# Altium PCB PCB1.PcbDoc
Units mil, origin at the board's own origin, x right, y up, seen from the top; angles counter-clockwise.
Board outline 1081.52 x 1073.8 mil, 2 copper layers (Top Layer, Bottom Layer); 25 components, 22 nets, 125 pads, 40 vias.
Unrouted connection lines stored in the file: 53.
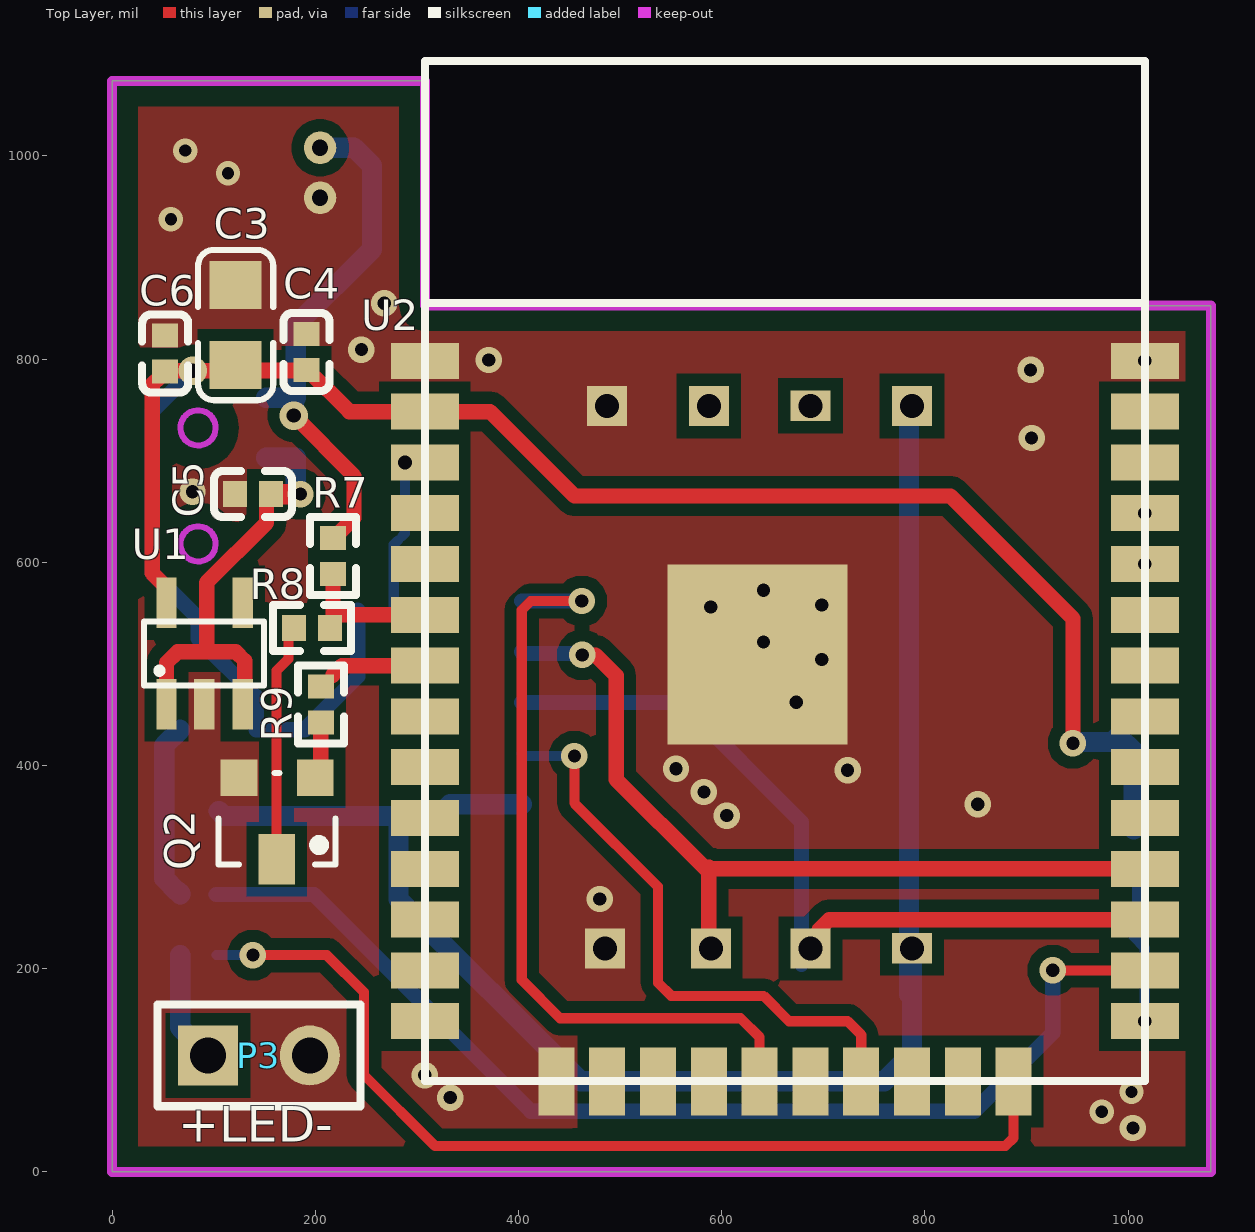
[diagram p0: Top Layer view]
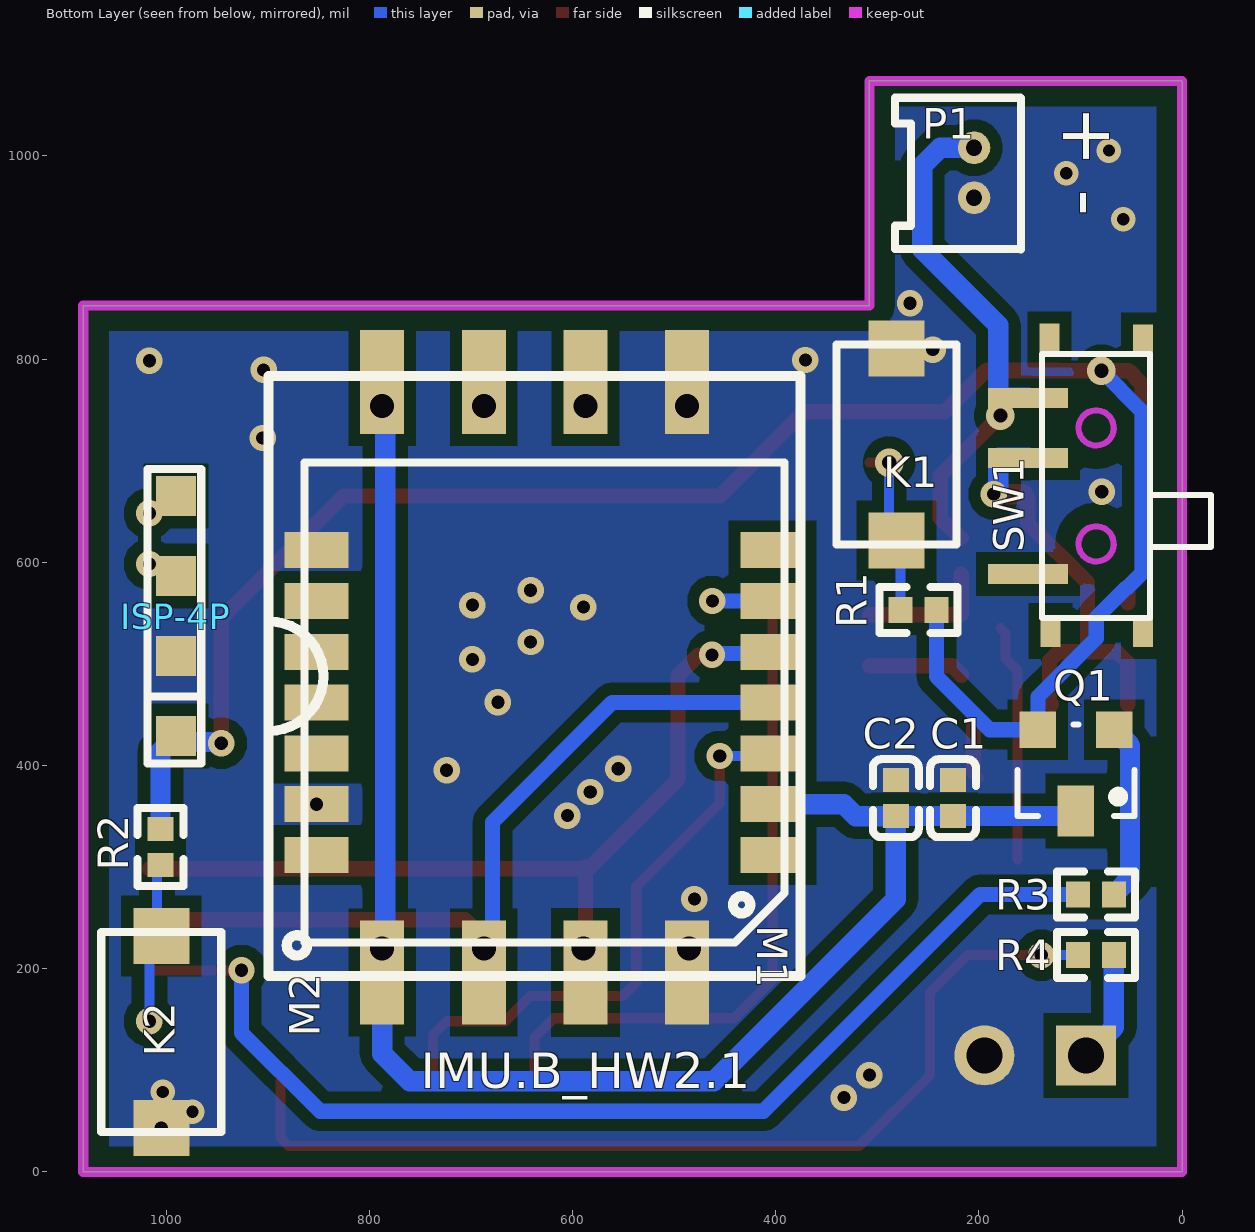
[diagram p1: Bottom Layer view, seen from below]
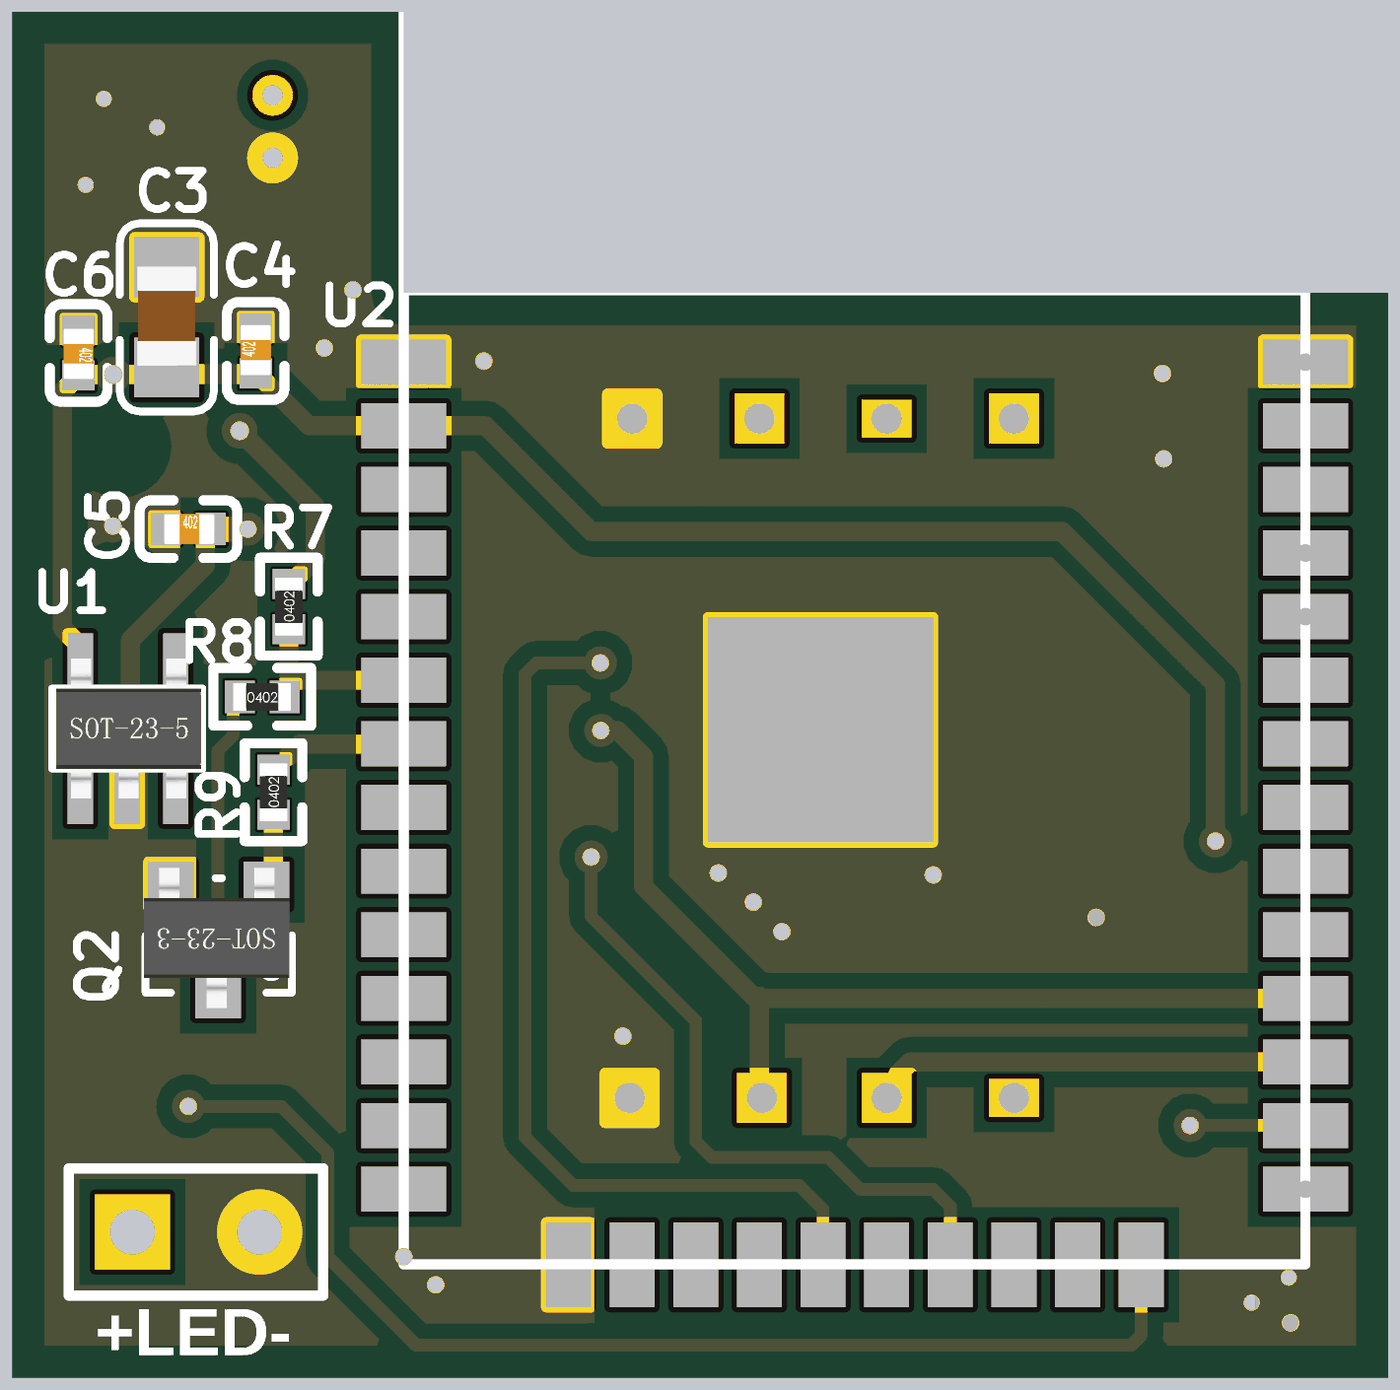
[diagram p2: 3D render of the assembled board from above, using the file's embedded part models]
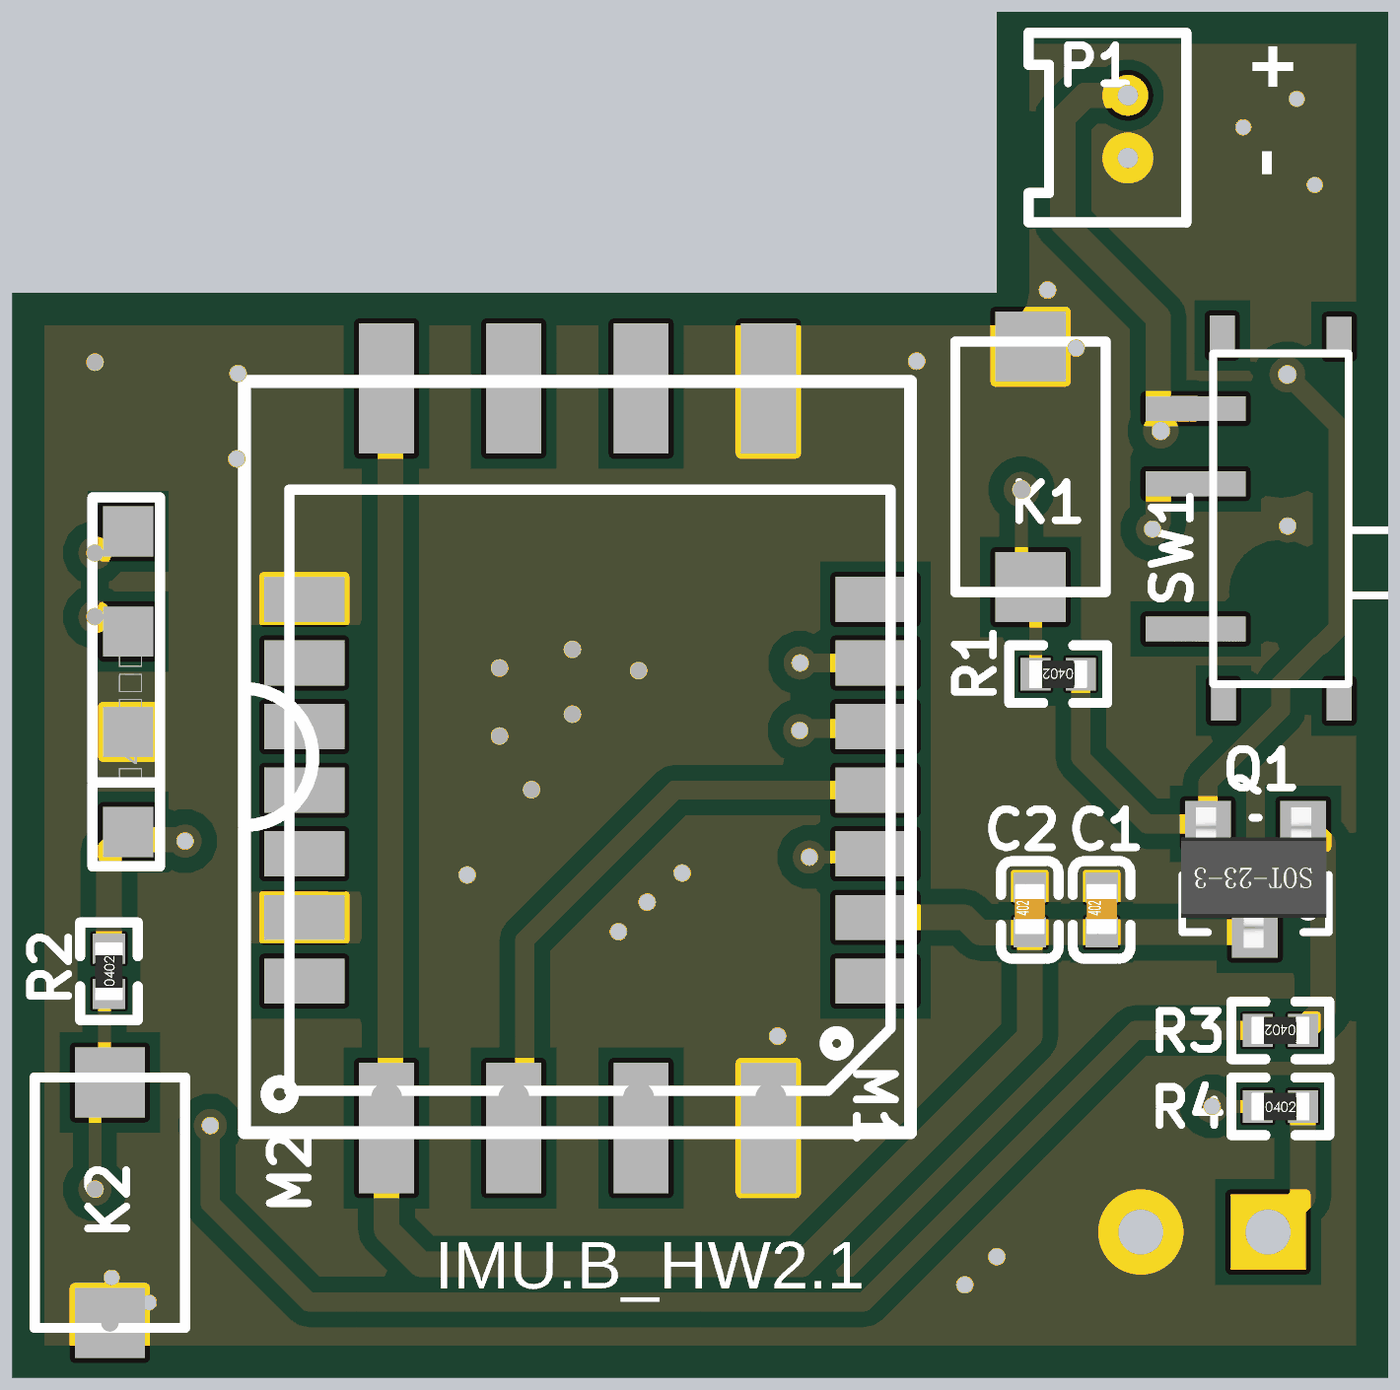
[diagram p3: 3D render of the assembled board from below, using the file's embedded part models]

## Layer stack, top to bottom
Top Solder: solder mask 0.4, Solder Resist, Dk 3.5
Top Layer: signal copper 1.4
Dielectric1: dielectric 12.6, FR-4, Dk 4.8
Bottom Layer: signal copper 1.4
Bottom Solder: solder mask 0.4, Solder Resist, Dk 3.5

## Board outline
0,0 1081.52,0 1081.52,852.74 307.78,852.74 307.78,1073.8 0,1073.8

## Design rules (kind name [scope] priority, off if disabled: settings)
Clearance Clearance_1 [OnLayer('Keep-Out Layer')] p1: gap=10 ignorepadtopadclearanceinfootprint=FALSE
Clearance [All] p2: gap=12 ignorepadtopadclearanceinfootprint=FALSE
PlaneConnect [All] p1: planeconnectstyle=Direct reliefexpansion=20 reliefentries=4 reliefconductorwidth=10 reliefairgap=10
PolygonConnect [All] p1: connectstyle=Direct reliefconductorwidth=10 reliefentries=4 polygonreliefangle="90 Angle" airgapwidth=10
RoutingVias [All] p1: holewidth=28 width=14 viastyle="Through Hole" minholewidth=24 minwidth=12 maxholewidth=200 maxwidth=100
SilkToSolderMaskClearance SilkscreenOverComponentPads [IsPad] p1: minsilkscreentomaskgap=10 clearancetoexposedcopper=TRUE
SolderMaskExpansion [All] p1: expansion=4 istentingtop=FALSE
Width [All] p1: maxlimit=200 minlimit=6 preferedwidth=10
28 further rules are at their usual default settings.

## Components (designator, comment, footprint, x,y, rotation, side; value= is the part's Value field where it differs from the comment)
C1 "4.7uF" 0402C 225.31,367.8 r90 bottom value=100nF
C2 "100nF" 0402C 281.79,367.8 r90 bottom
C3 "22uF" 0805C 121.56,833.52 r90 top value=100nF
C4 "100nF" 0402C 191.41,807.09 r90 top
C5 "10uF" 0402C 138.52,667.1 r0 top
C6 "1uF" 0402C 52.23,805.51 r270 top
ISP-4P "ISP-4P" ISP-4P-2.0/SMD 990.35,429 r90 bottom
K1 "RESET" KEY-SMD/2P/3*4 281.25,716.01 r180 bottom
K2 "BOOT" KEY-SMD/2P/3*4 1004.7,137.71 r0 bottom
M1 "imu" HI229 627.5,461.89 r0 bottom
M2 "GY95T" GY95T 637.26,487.94 r90 bottom
P1 "Header 2" CON-1.25-2P 204.69,1008.01 r270 bottom
P3 "Header 2" HDR1X2 94.52,114.65 r0 top
Q1 "SI2301" SOT-23 66.84,435.28 r0 bottom
Q2 "SI2300" SOT-23 199.84,387.74 r180 top
R1 "10K" 0402 259.44,553.11 r0 bottom
R2 "10K" 0402 1005.44,319.55 r90 bottom
R3 "10K" 0402 84.84,273.09 r0 bottom
R4 "150R" 0402 84.84,213.37 r180 bottom
R7 "10K/1%" 0402 217.44,606.17 r90 top
R8 "10K/1%" 0402 196.52,535.28 r0 top
R9 "10K" 0402 205.39,460.28 r90 top
SW1 "SW-SPDT" SW_MSK12C01 84.55,675.2 r0 bottom
U1 "ME6217C33M5G" SOT-23-5 90.52,510.28 r90 top
U2 "ESP-32S" ESP-32S 623.06,564.57 r0 top locked

## Footprints (in the part's own frame and the unit in brackets; to place one, negate y for a bottom-side part, rotate by r counter-clockwise, add the part's x,y. Pads: shape width x height; smd on the part's side, far side on the other; paste and mask are expansions set on the pad)
0402 [mm]
  rect 0.6x0.65 smd mask+0.051: 1(-0.45,0) 2(0.45,0)
  silkscreen extent -0.97,-0.58 0.97,0.58, body extent -0.57,-0.27 0.58,0.28, height 0.41
0402C [mm]
  rect 0.6x0.65 smd mask+0.051: 1(-0.45,0) 2(0.45,0)
  silkscreen extent -0.97,-0.58 0.97,0.58, body extent -0.48,-0.3 0.52,0.3, height 0.2
0805C [mm]
  rect 1.2x1.3 smd: 1(-1,0) 2(1,0)
  silkscreen extent -1.88,-0.94 1.88,0.94, body extent -0.97,-0.6 1.03,0.6, height 0.95
CON-1.25-2P [mil]
  round 32 hole 16: 1(0,0) 2(49.21,0)
  silkscreen extent -49,-78 100,46
ESP-32S [mm]
  rect 1.7x0.9 smd: 1(-8.009,5.937) 2(-8.009,4.667) 3(-8.009,3.397) 4(-8.009,2.127) 5(-8.009,0.857) 6(-8.009,-0.413) 7(-8.009,-1.683) 8(-8.009,-2.953) 9(-8.009,-4.223) 10(-8.009,-5.493) 11(-8.009,-6.763) 12(-8.009,-8.033) 13(-8.009,-9.303) 14(-8.009,-10.573) 25(9.991,-10.573) 26(9.991,-9.303) 27(9.991,-8.033) 28(9.991,-6.763) 29(9.991,-5.493) 30(9.991,-4.223) 31(9.991,-2.953) 32(9.991,-1.683) 33(9.991,-0.413) 34(9.991,0.857) 35(9.991,2.127) 36(9.991,3.397) 37(9.991,4.667) 38(9.991,5.937)
  rect 0.9x1.7 smd: 15(-4.719,-12.083) 16(-3.449,-12.083) 17(-2.179,-12.083) 18(-0.909,-12.083) 19(0.361,-12.083) 20(1.631,-12.083) 21(2.901,-12.083) 22(4.171,-12.083) 23(5.441,-12.083) 24(6.711,-12.083)
  rect 4.5x4.5 smd: 39(0.311,-1.403)
  silkscreen extent -8.01,-12.07 9.99,13.43
GY95T [mm]
  rect 2.6x1.1 smd: 1(-7.405,3.81) 2(-7.405,1.27) 3(-7.405,-1.27) 4(-7.405,-3.81) 5(7.356,-3.81) 6(7.356,-1.27) 7(7.356,1.27) 8(7.356,3.81)
  rect 0.762x1 hole 0.6: 1(-6.805,3.81) 7(6.756,1.27)
  rect 0.762x1 / inner rect 0.762x1 / far side rect 1x1 hole 0.6: 2(-6.805,1.27) 3(-6.805,-1.22) 4(-6.805,-3.86) 5(6.756,-3.81) 6(6.756,-1.27) 8(6.756,3.81)
  silkscreen extent -7.5,-6.65 7.5,6.65
HDR1X2 [mm] "Connector; Header; 2 Position"
  rect 1.5x1.5 hole 0.9: 1(0,0)
  round 1.5 hole 0.9: 2(2.54,0)
  silkscreen extent -1.27,-1.27 3.81,1.27
HI229 [mm]
  rect 1.6x0.9 smd: 1(-5.7,3.81) 2(-5.7,2.54) 3(-5.7,1.27) 4(-5.7,0) 5(-5.7,-1.27) 6(-5.7,-2.54) 7(-5.7,-3.81) 8(5.7,-3.81) 9(5.7,-2.54) 10(5.7,-1.27) 11(5.7,0) 12(5.7,1.27) 13(5.7,2.54) 14(5.7,3.81)
  silkscreen extent -6,-6 6,6
ISP-4P-2.0/SMD [mm]
  rect 1x1 smd paste+0: 1(0,0) 2(2,0) 3(4,0) 4(6,0)
  silkscreen extent -0.69,-0.64 6.68,0.71
KEY-SMD/2P/3*4 [mm] "3*6*4.3"
  rect 1.4x1.4 smd: 1(0,2.4) 2(0,-2.4)
  silkscreen extent -1.5,-2.5 1.5,2.5
SOT-23 [mil]
  rect 36x36 smd: 1(0,0) 2(75,0)
  rect 36x50 smd: 3(38,80)
  silkscreen extent -20,-5 95,85, body extent -18,-13 96,97, height 47
SOT-23-5 [mil]
  rect 50x20 smd: 1(-50,37) 2(-50,0) 3(-50,-38) 4(50,-38) 5(50,37)
  silkscreen extent -31,-59 32,59, body extent -55,-58 55,56, height 47
SW_MSK12C01 [mm]
  rect 2x0.5 smd: 1(1.7,2.2) 2(1.7,-0.7) 3(1.7,-2.2)
  rect 0.5x0.8 smd: 4(1.168,-3.658) 5(-1.168,-3.632) 6(-1.168,3.632) 7(1.143,3.632)
  Keep-Out Layer lines w0.152: -0.131,1.87 ccw(c0,1.45) -0.091,1.881 ; -0.131,-1.03 ccw(c0,-1.45) -0.091,-1.019
  silkscreen extent -2.87,-3.3 1.35,3.3

## Part data
C1 C2 C3 C4: library part CAP, "Capacitor", Published=8-Jun-2000, Publisher="Altium Limited", Revision="July-2002: Re-released for DXP Platform."
C5 C6: library part Cap, "Capacitor"
ISP-4P: "Header, 4-Pin", LatestRevisionDate=17-Jul-2002, LatestRevisionNote="Re-released for DXP Platform.", Publisher="Altium Limited"
K1 K2: library part BUTTON_2P
M1: library part HI229
P1 P3: "Header, 2-Pin", LatestRevisionDate=17-Jul-2002, LatestRevisionNote="Re-released for DXP Platform.", Publisher="Altium Limited"
Q1: library part MOSFET-P, "P-Channel Power MOSFET"
Q2: library part MOSFET-N, "N-Channel Power MOSFET"
R1 R2 R3 R4 R7 R8 R9: library part Res1, "Resistor"
SW1: "SPDT Subminiature Toggle Switch, Right Angle Mounting, Vertical Actuation"
U1: library part ME6212, "2~6V Input, 350mA output，Voltage LDO"
U2: "ESP32-S系列模组"

## Via types
v1: diameter 26, hole 13, Top Layer to Bottom Layer, tented both sides, 32 vias
v2: diameter 24, hole 12, Top Layer to Bottom Layer, tented both sides, 5 vias
v3: diameter 28, hole 14, Top Layer to Bottom Layer, tented both sides, 3 vias

## Nets (pads, with @x,y where several pads share a name; then routed paths per layer and width w, separated by ;. In a path a pad name is that pad's centre, name@x,y a point inside that pad or via, vN(x,y) a via of type N, cw(c..) or ccw(c..) an arc to the next point about the centre after c; other vN are vias at no path point)
3V3: C3.1 C4.1 C6.2 ISP-4P.1 Q1.2 R1.1 R2.2 U1.5 U2.2 | length 2238.2
  Top Layer w10: C3.1@121.56,787.8 C4.1@190.71,787.8 ; C3.1@122.92,791.72 C4.1@188.9,791.72
  Top Layer w15: U1.5 53.52,575.28 39.44,589.37 39.44,775 46.94,782.5 46.94,783.49 51.25,787.8 C6.2 53.02,788.58 v3(79.39,788.58) 190.63,788.58 C4.1 192.4,789.37 233.47,748.29 U2.2 371.91,748.29 454.98,665.22 825.17,665.22 945.65,544.75 v1(945.65,421.9)
  Bottom Layer w15: v3(79.39,788.58) 39.44,748.64 39.44,589.37 53.52,575.28 54.55,575.28 84.55,545.28 84.55,524.92 141.84,467.64 Q1.2 189.48,435.28 241.72,487.52 R1.1
  Bottom Layer w20: v1(945.65,421.9) 946.8,423.05 984.39,423.05 ISP-4P.1 1005.44,413.92 R2.2
ADC_EN: R9.2 U2.7 | length 94.9
  Top Layer w15: R9.2@217.44,488.49 217.44,489.47 226.26,498.29 U2.7
ADC_VBAT: R7.1 R8.2 U2.6 | length 130.5
  Top Layer w15: R7.1 217.44,548.29 U2.6
EN: K1.2 R1.2 U2.3 | length 162.8
  Top Layer w10: v3(288.29,698.11) 307.55,698.11 U2.3
  Bottom Layer w10: R1.2 277.16,617.43 K1.2 ; K1.2@285.71,625.99 288.29,628.56 v3(288.29,698.11)
GND: C1.2 C2.2 C3.2 C4.2 C5.1 C6.1 ISP-4P.2 K1.1 K2.1 M1.8 M1.13 M2.4 M2.5 P1.2 P3.2 Q2.2 U1.2 U2.1 U2.15 U2.38 U2.39
  other v1: 1004.7,43.22 332.84,73.12 307.73,95.3 479.98,268.58 604.98,350.69 851.91,361.89 582.49,373.89 723.87,395.28 554.98,396.81 673.39,462.32 698.51,504.45 641.2,521.6 589.23,555.9 698.51,557.92 641.2,572.51 79.12,669.49 904.98,722.34 903.99,789.37 1016.39,798.29 370.72,799.08 245.37,809.39 267.81,855.03
  other v2: 974.07,59.17 1003.3,78.78 57.82,937.62 114,982.89 72,1005.25
IMU_RST: M1.9
IO0: K2.2 R2.1 U2.25 | length 147.4
  Bottom Layer w10: K2.2 1016.39,220.51 v1(1016.39,148.29) ; K2.2@1008.96,232.2 R2.1@1008.96,290.83
IO2: R4.1 U2.24 | length 976.8
  Top Layer w10: v1@130.55,213.37 v1(138.52,213.37) 211.34,213.37 247.95,176.76 247.95,95.3 317.66,25.59 879.33,25.59 887.26,33.52 U2.24
  Bottom Layer w10: R4.1 v1(138.52,213.37)
NetC5_2: C5.2 SW1.2 U1.1 U1.3 | length 447
  Top Layer w15: U1.1 53.52,501.13 64.29,511.89 93.03,511.89 ; U1.3 130.55,462.32 130.55,503.11 121.77,511.89 93.03,511.89 ; C5.2 151.93,662.79 151.93,638.86 93.03,579.96 93.03,511.89
  Top Layer w20: C5.2 v1(185.36,667.1)
  Bottom Layer w20: SW1.2 180.69,702.76 180.85,702.6 180.85,673.23 185.36,668.72 v1(185.36,667.1)
NetP3_1: P3.1 R4.2 | length 110.1
  Bottom Layer w20: R4.2 67.12,142.05 P3.1
NetQ1_1: Q1.1 R3.1 | length 175.8
  Bottom Layer w20: Q1.1 51.25,419.7 51.25,288.96 64.32,275.89 65.31,275.89 67.12,274.08 R3.1
NetQ2_1: Q2.1 R9.1 | length 57.1
  Top Layer w10: Q2.1 Q2.1@205.39,393.29
  Top Layer w15: Q2.1@205.39,393.29 R9.1
NetQ2_3: Q2.3 R8.1 | length 234.6
  Top Layer w10: Q2.3 161.84,493.2 173.64,505.01 173.64,530.12 R8.1
SS_RX: M1.4 M2.2 U2.27 | length 817.6
  Top Layer w15: M2.2@695.77,209.85 695.77,238.22 705.84,248.29 U2.27
  Bottom Layer w15: M1.4 560.92,461.89 678.63,344.18 M2.2@678.63,204.03
SS_TX: M1.5 M2.3 U2.28 | length 843.5
  Top Layer w15: v1(462.64,508.81) 475.79,508.81 496.12,488.49 496.12,386.32 582.49,299.95 ; M2.3@587.26,220.02 587.26,295.18 582.49,299.95 ; U2.28 589.07,298.29 587.42,299.95 582.49,299.95
  Bottom Layer w15: M1.5 404.63,510.35 461.1,510.35 v1(462.64,508.81)
SSPWR_EN: R3.2 U2.26 | length 1095.7
  Top Layer w10: v1(925.77,198.38) 1016.31,198.38 U2.26
  Bottom Layer w15: R3.2 198.68,273.09 412.04,59.74 848.61,59.74 925.77,136.9 v1(925.77,198.38)
SYNC_IN: M1.6 U2.19 | length 787.9
  Top Layer w10: v1(462.26,561.89) 411.88,561.89 403.09,553.11 403.09,485.89 403.09,188.98 440.77,151.3 618.54,151.3 637.26,132.58 U2.19
  Top Layer w15: v1(462.26,561.89) v1@462.64,562.27
  Bottom Layer w15: M1.6 v1(462.26,561.89)
SYNC_OUT: M1.3 U2.21 | length 577.5
  Top Layer w10: v1(454.98,409.32) 454.98,362.95 537.26,280.66 537.26,186.19 550.15,173.3 641.2,173.3 666.21,148.29 723.87,148.29 737.26,134.91 U2.21
  Bottom Layer w10: M1.3 405.66,409.32 v1(454.98,409.32)
U0_RXD: ISP-4P.3 U2.34
  other v1: 1016.39,598.29
U0_TXD: ISP-4P.4 U2.35
  other v1: 1016.39,648.29
VBAT: P1.1 R7.2 SW1.3 | length 546.2
  Top Layer w15: v3(178.8,744.37) 238.11,685.06 238.11,643.57 222.74,628.2 221.75,628.2 R7.2
  Bottom Layer w20: v3(178.8,744.37) 178.8,761.66 178.65,761.81 SW1.3 180.69,761.81 180.85,761.97 180.85,833.23 255.85,908.23 255.85,990.28 238.11,1008.01 P1.1
VCC_IMU: C1.1 C2.1 M1.2 M2.1 M2.8 Q1.3 | length 1662.6
  Bottom Layer w20: Q1.3 109.84,350.28 C2.1@281.79,350.28 ; M1.2 332.84,361.89 321.03,350.08 C2.1 281.79,268.49 461.04,89.24 760.14,89.24 787.26,116.36 787.26,196.4 M2.1@787.26,220.02 ; M2.1@784.29,174.75 M2.8@784.29,755.91
pads on no net: M1.1 M1.7 M1.10 M1.11 M1.12 M1.14 M2.6 M2.7 SW1.1 SW1.4 SW1.5 SW1.6 SW1.7 U1.4 U2.4 U2.5 U2.8 U2.9 U2.10 U2.11 U2.12 U2.13 U2.14 U2.16 U2.17 U2.18 U2.20 U2.22 U2.23 U2.29 U2.30 U2.31 U2.32 U2.33 U2.36 U2.37

## Polygon pours and split planes (outlines as drawn)
GND on Top Layer "GND_L01_P000" (solid, pour order 0): 5.48,1073.8 5.48,0 1081.52,0 1081.52,852.74 310.03,852.74 307.73,855.03 307.73,1073.8
GND on Bottom Layer "GND_L02_P001" (solid, pour order 1): 5.48,1073.8 5.48,0 1081.52,0 1081.52,852.74 310.03,852.74 307.73,855.03 307.73,1073.8

## Keep-outs
Keep-Out Layer:
  the board outline again, w10

## Silkscreen, mask and mechanical layers (free items; w line width, h text height)
Top Overlay:
  text "+LED-" at 65.31,17.79 h60
Bottom Overlay:
  text "+ -" at 134.29,1049.5 h90 r90
  text "IMU.B_HW2.1" at 749.52,70.4 h60

## Dimensions
0,0 to 1081.52,0 on Mechanical 2
0,0 to 0,1073.8 on Mechanical 2

## Text inside footprints (layer, text, board x,y; h text height)
ISP-4P: Bottom Paste "这4个不开钢网" at 979.41,462.16 h30 r270
M2: Mechanical 3 "PS" at 663.64,616.59 h39.37 r270; Mechanical 3 "GND" at 467.07,591.94 h39.37 r270; Mechanical 3 "VCC" at 767.26,280.94 h39.37 r270; Mechanical 3 "TX" at 571.07,280.94 h39.37 r270; Mechanical 3 "RX" at 670.26,280.94 h39.37 r270; Mechanical 3 "IO" at 570.64,623.15 h39.37 r270; Mechanical 3 "VCC" at 766.26,591.94 h39.37 r270; Mechanical 3 "GND" at 468.07,280.94 h39.37 r270
U2: Mechanical 3 "IO14" at 351.06,139.57 h30; Mechanical 3 "IO12" at 353.06,182.57 h30; Mechanical 3 "IO33" at 353.06,382.57 h30; Mechanical 3 "IO25" at 353.06,332.57 h30; Mechanical 3 "IO26" at 353.06,282.57 h30; Mechanical 3 "IO27" at 353.06,232.57 h30; Mechanical 3 "IO32" at 353.06,432.57 h30; Mechanical 3 "IO35" at 353.06,482.57 h30; Mechanical 3 "IO34" at 353.06,532.57 h30; Mechanical 3 "IO13" at 503.06,134.57 h30 r90; Mechanical 3 "SWP/SD2" at 552.78,136.57 h30 r90; Mechanical 3 "SHD/SD3" at 602.49,136.57 h30 r90; Mechanical 3 "SCS/CMD" at 652.21,135.57 h30 r90; Mechanical 3 "SCK/CLK" at 701.92,136.57 h30 r90; Mechanical 3 "SDO/SD0" at 751.63,136.57 h30 r90; Mechanical 3 "SDI/SD1" at 801.35,136.57 h30 r90; Mechanical 3 "IO15" at 851.06,136.57 h30 r90; Mechanical 3 "U0RXD" at 830.08,583.19 h30; Mechanical 3 "IO16" at 870.07,234.26 h30; Mechanical 3 "IO17" at 870.07,284.11 h30; Mechanical 3 "IO18" at 870.07,383.8 h30; Mechanical 3 "IO19" at 870.07,433.65 h30; Mechanical 3 "IO21" at 875.07,533.34 h30; Mechanical 3 "IO4" at 895.06,184.42 h30; Mechanical 3 "IO5" at 895.06,333.95 h30; Mechanical 3 "IO0" at 895.06,134.57 h30; Mechanical 3 "NC" at 920.05,483.49 h30; Mechanical 3 "VDD33" at 353.06,732.57 h30; Mechanical 3 "GND" at 393.06,783.57 h30; Mechanical 3 "CHP_PU" at 353.06,687.57 h30; Mechanical 3 "SENSOR_VN" at 353.06,587.57 h30; Mechanical 3 "SENSOR_VP" at 353.06,637.57 h30; Mechanical 3 "U0TXD" at 830.08,633.03 h30; Mechanical 3 "IO22" at 865.07,682.88 h30; Mechanical 3 "IO23" at 865.07,732.72 h30; Mechanical 3 "GND" at 890.06,782.57 h30; Mechanical 3 "IO2" at 949.06,52.57 h30 r90; Mechanical 3 "GND" at 407.06,51.57 h30 r90